# Altium PCB PCB main.PcbDoc (part 1 of 2)
Units mm, origin at the board's own origin, x right, y up, seen from the top; angles counter-clockwise.
Board outline 83.62 x 83.62 mm, 2 copper layers (Top Layer, Bottom Layer); 47 components, 37 nets, 165 pads, 21 vias.
Unrouted connection lines stored in the file: 3.
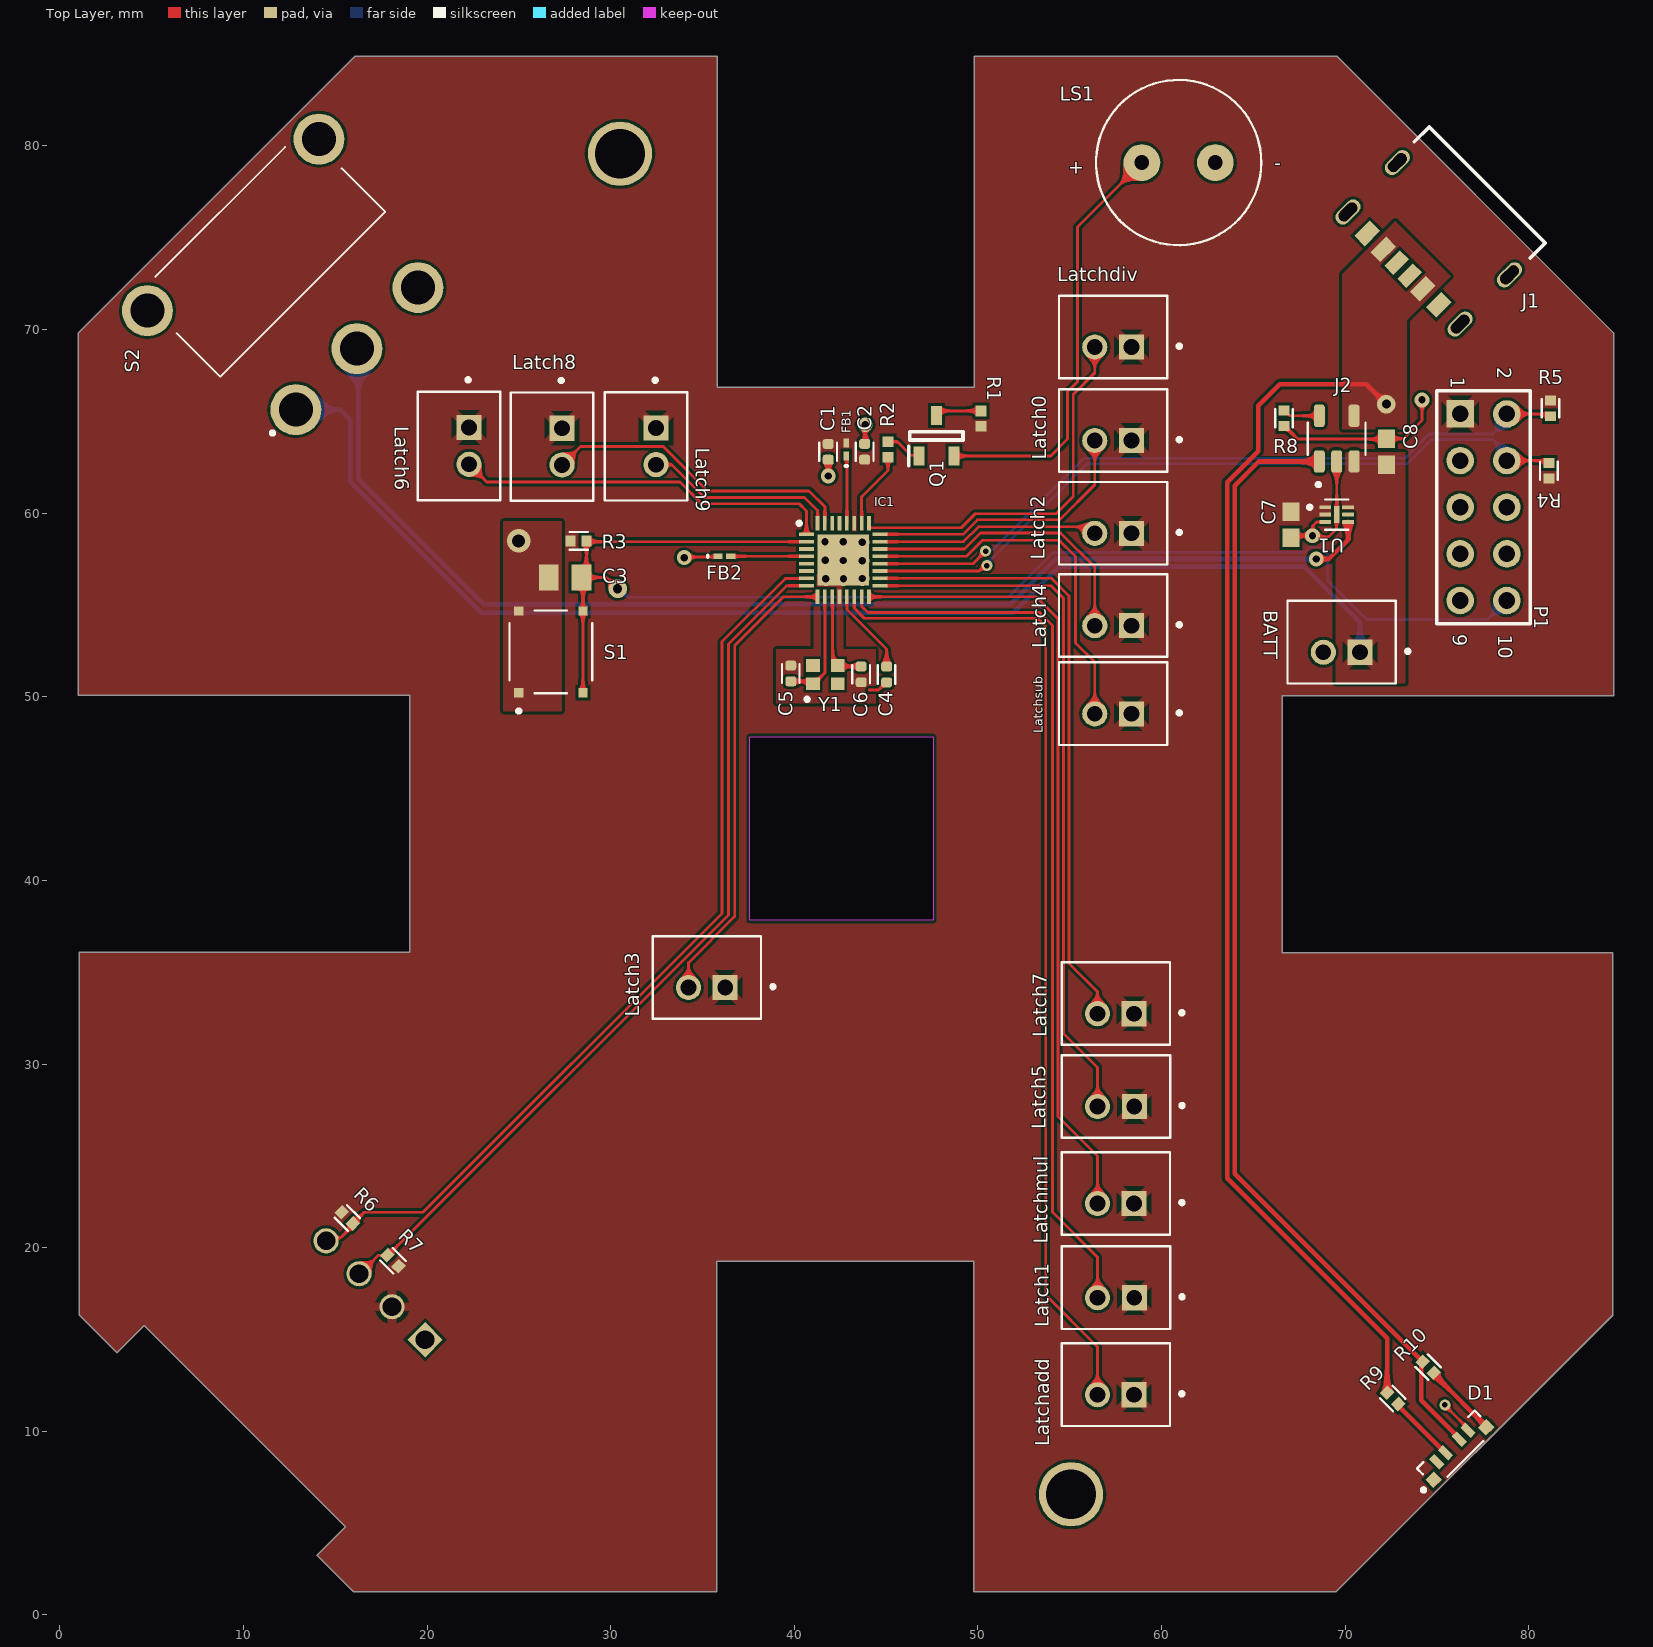
[diagram p0: Top Layer view]
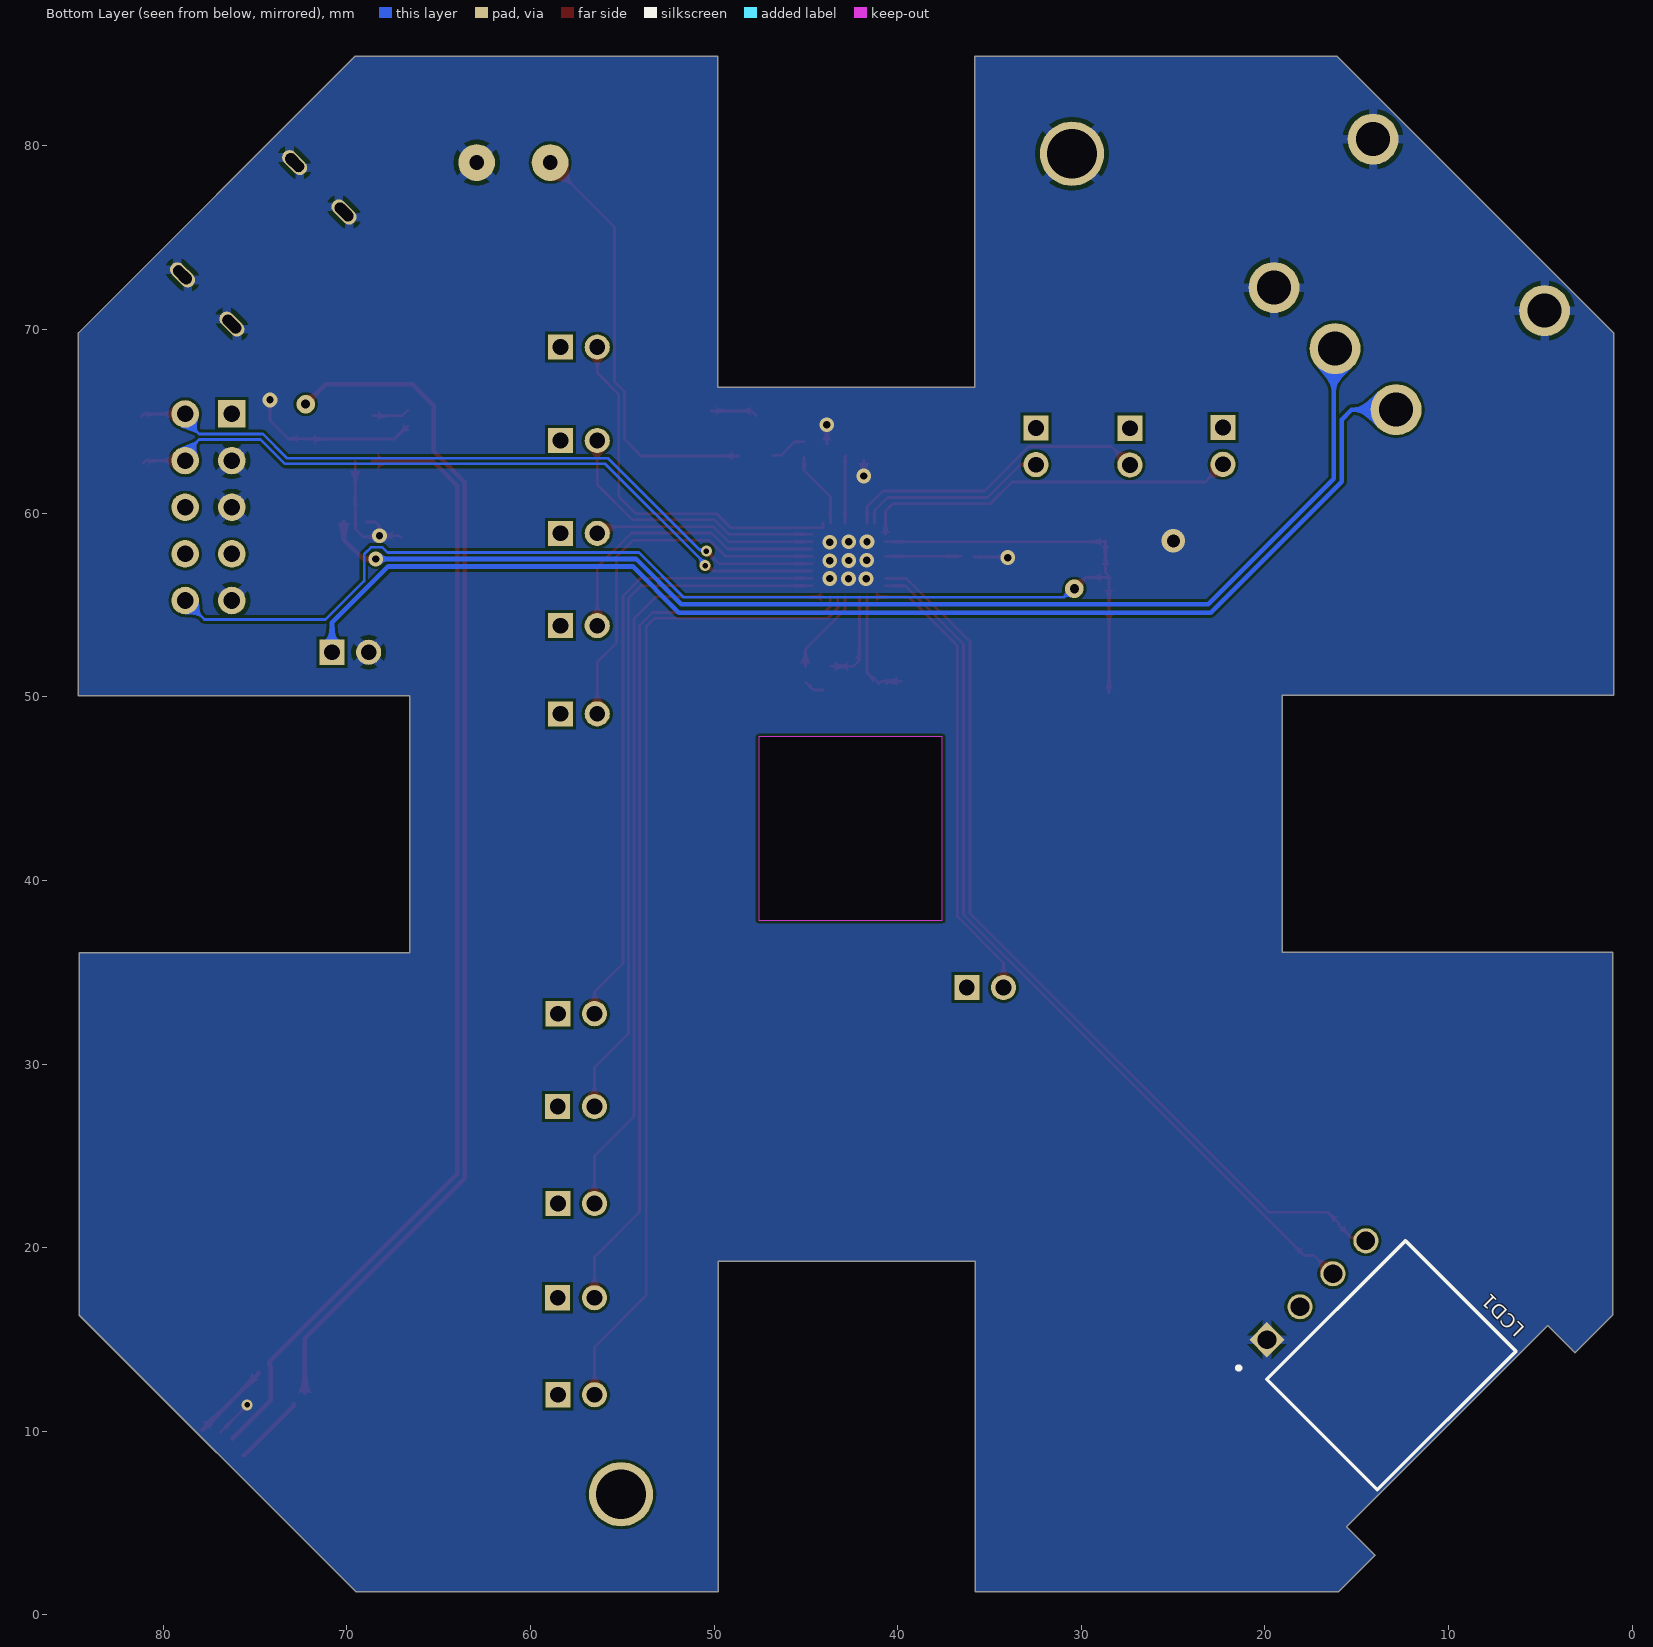
[diagram p1: Bottom Layer view, seen from below]
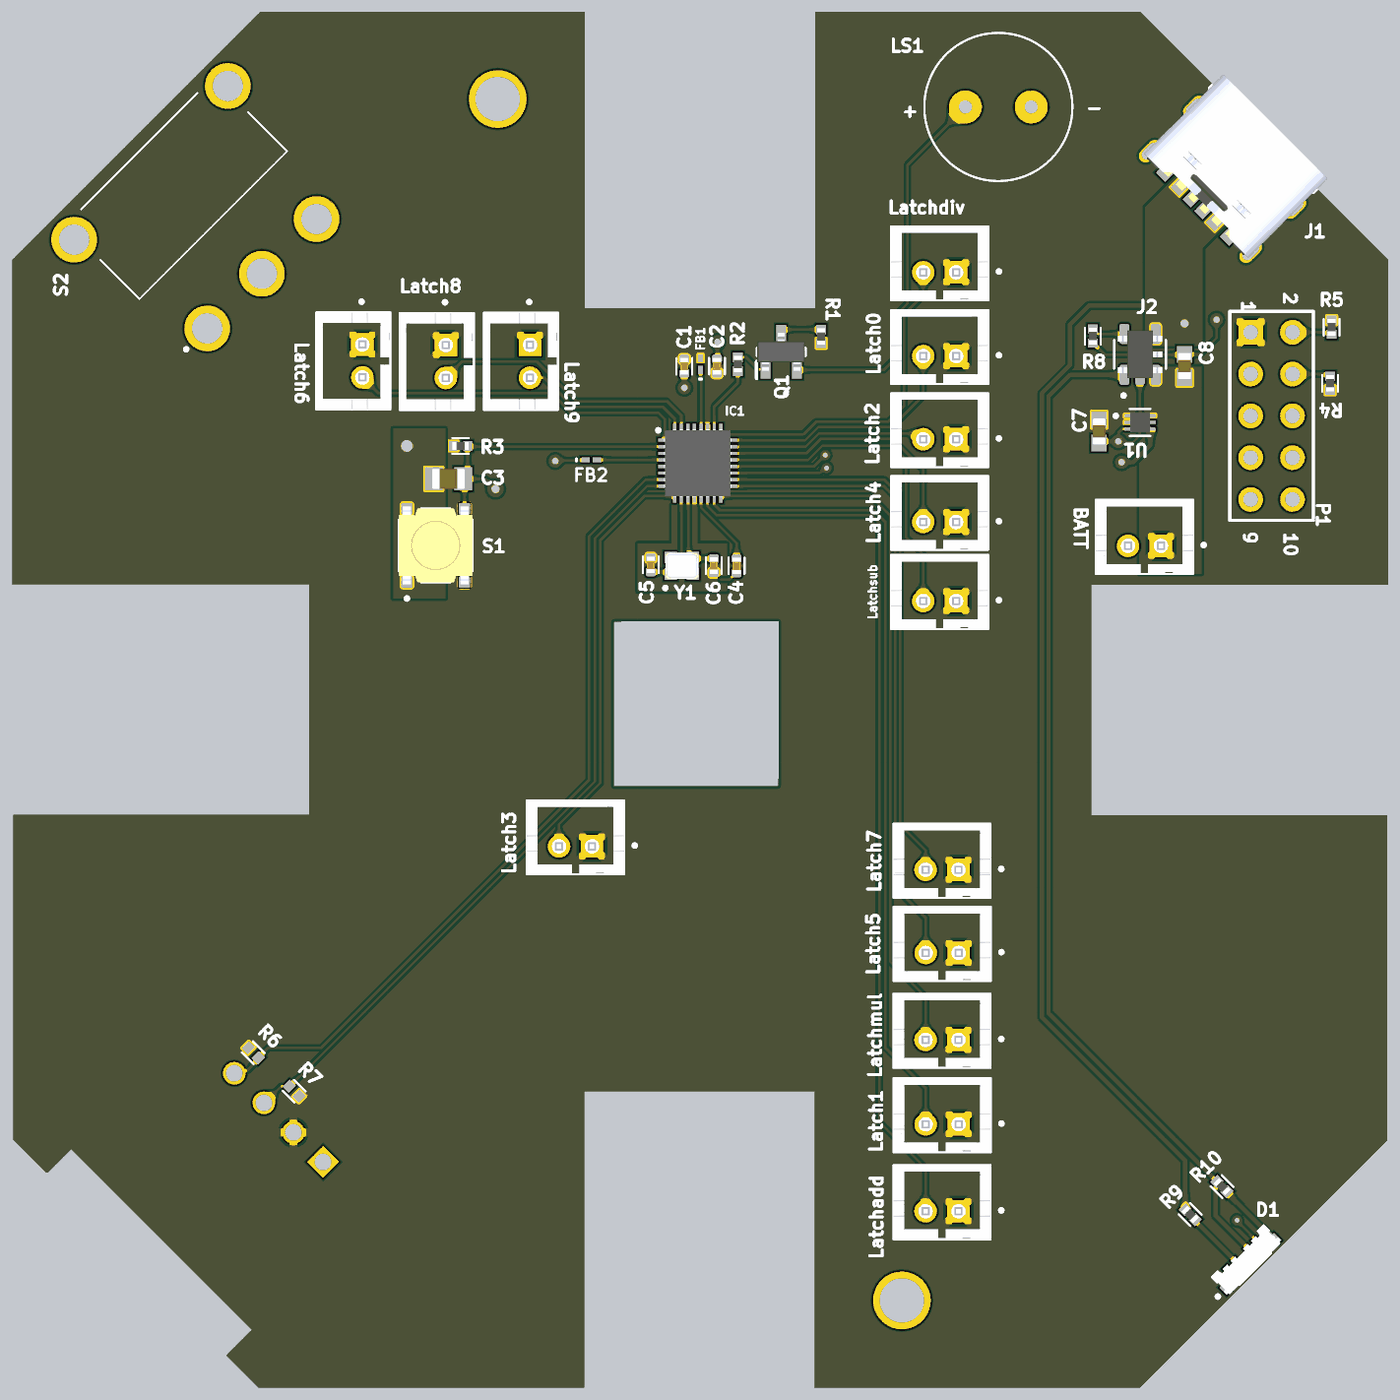
[diagram p2: 3D render of the assembled board from above, using the file's embedded part models]

## Layer stack, top to bottom
Top Solder: solder mask 0.0102, Solder Resist, Dk 3.5
Top Layer: signal copper 0.0356
Dielectric 1: dielectric 0.32, FR-4, Dk 4.8
Bottom Layer: signal copper 0.0356
Bottom Solder: solder mask 0.0102, Solder Resist, Dk 3.5

## Board outline
14.005,3.241 15.559,4.795 4.597,15.757 3.115,14.275 1.065,16.325 1.065,36.075 19.065,36.075 19.065,50.075 1.011,50.075 1.011,69.825 16.066,84.88 35.816,84.88 35.816,66.86 49.816,66.86 49.816,84.88 69.566,84.88 69.573,84.873 84.627,69.818 84.627,50.068 66.573,50.068 66.573,36.068 84.573,36.068 84.573,16.318 69.519,1.264 49.769,1.264 49.769,19.264 35.769,19.264 35.769,1.264 15.983,1.264
cut-out: 37.565,47.818 47.565,47.818 47.565,37.818 37.565,37.818

## Design rules (kind name [scope] priority, off if disabled: settings)
Clearance [All] p1: gap=0.15 ignorepadtopadclearanceinfootprint=TRUE
ComponentClearance [All] p1: gap=0 collisioncheckmode=3 verticalgap=0 showdistances=FALSE donotcheckwithout3dbody=TRUE
PlaneConnect [All] p1: pad.planeconnectstyle=Relief pad.reliefexpansion=0.508 pad.reliefentries=4 pad.reliefconductorwidth=0.254 pad.reliefairgap=0.254 via.planeconnectstyle=Direct via.reliefexpansion=0.508 via.reliefentries=4 via.reliefconductorwidth=0.254 via.reliefairgap=0.254
PolygonConnect [All] p1: thpad.connectstyle=Relief thpad.reliefconductorwidth=0.5 thpad.reliefentries=4 thpad.polygonreliefangle="45 Angle" thpad.airgapwidth=0.25 smdpad.connectstyle=Direct smdpad.reliefconductorwidth=0.254 smdpad.reliefentries=4 smdpad.polygonreliefangle="90 Angle" smdpad.airgapwidth=0.254 via.connectstyle=Direct via.reliefconductorwidth=0 via.reliefentries=4 via.polygonreliefangle="90 Angle" via.airgapwidth=0.254
RoutingVias [All] p1: holewidth=0.4 width=0.8 viastyle="Through Hole" minholewidth=0.3 minwidth=0.6 maxholewidth=0.711 maxwidth=1.27
SolderMaskExpansion [All] p1: expansion=0.102 istentingtop=FALSE
Width [All] p1: maxlimit=0.5 minlimit=0.15 preferedwidth=0.254 checkconnectedcopper=TRUE
28 further rules are at their usual default settings.

## Classes and differential pairs
component class Power: BATT C7 C8 D1 J1 J2 R8 R9 S2 U1
component class MCU: C1 C2 C3 C4 C5 C6 FB1 FB2 IC1 Latch0 Latch1 Latch2 Latch3 Latch4 Latch5 Latch6 Latch7 Latch8 Latch9 Latchadd Latchdiv Latchmul Latchsub LCD1 LS1 P1 Q1 R1 R2 R3 R4 R5 R6 R7 S1 Y1

## Components (designator, comment, footprint, x,y, rotation, side; value= is the part's Value field where it differs from the comment)
BATT "" JST_B2B-PH-K-S(LF)(SN) 69.815,52.976 r0 top
C1 "100nF" CAPC1005X55N 41.851,63.343 r90 top
C2 "100nF" CAPC1005X55N 43.836,63.344 r270 top
C3 "10uF" CAPC2012X140N 27.521,56.496 r0 top
C4 "1uF" CAPC1005X55N 45.03,51.214 r90 top
C5 "20pF" CAPC1005X55N 39.811,51.27 r90 top
C6 "20pF" CAPC1005X55N 43.646,51.221 r270 top
C7 "" CAPC1608X90N 67.056,59.381 r90 top
C8 "" CAPC1608X90N 72.251,63.35 r270 top
D1 "" LED_QLS6B-FKW-CNSNSF043 76.124,8.915 r45 top
FB1 "850mR" 0603 42.839,63.465 r90 top
FB2 "850mR" 0603 36.195,57.648 r0 top
IC1 "NUC029TAN" QFN40P400X400X80-33N 42.669,57.448 r0 top
J1 "" GCT_USB4125-GF-A_REVA2 75.335,75.472 r135 top
J2 "" SOT95P280X145-5N 69.545,64.059 r90 top
Latch0 "" JST_B2B-PH-K-S(LF)(SN) 57.369,64.507 r0 top
Latch1 "B2B-PH-K-S(LF)(SN)" JST_B2B-PH-K-S(LF)(SN) 57.522,17.822 r0 top
Latch2 "B2B-PH-K-S(LF)(SN)" JST_B2B-PH-K-S(LF)(SN) 57.369,59.453 r0 top
Latch3 "B2B-PH-K-S(LF)(SN)" JST_B2B-PH-K-S(LF)(SN) 35.239,34.713 r0 top
Latch4 "B2B-PH-K-S(LF)(SN)" JST_B2B-PH-K-S(LF)(SN) 57.369,54.423 r0 top
Latch5 "B2B-PH-K-S(LF)(SN)" JST_B2B-PH-K-S(LF)(SN) 57.522,28.236 r0 top
Latch6 "B2B-PH-K-S(LF)(SN)" JST_B2B-PH-K-S(LF)(SN) 21.737,63.662 r90 top
Latch7 "B2B-PH-K-S(LF)(SN)" JST_B2B-PH-K-S(LF)(SN) 57.512,33.291 r0 top
Latch8 "B2B-PH-K-S(LF)(SN)" JST_B2B-PH-K-S(LF)(SN) 26.809,63.627 r90 top
Latch9 "B2B-PH-K-S(LF)(SN)" JST_B2B-PH-K-S(LF)(SN) 31.923,63.643 r90 top
Latchadd "B2B-PH-K-S(LF)(SN)" JST_B2B-PH-K-S(LF)(SN) 57.512,12.539 r0 top
Latchdiv "B2B-PH-K-S(LF)(SN)" JST_B2B-PH-K-S(LF)(SN) 57.369,69.596 r0 top
Latchmul "B2B-PH-K-S(LF)(SN)" JST_B2B-PH-K-S(LF)(SN) 57.512,22.953 r0 top
Latchsub "B2B-PH-K-S(LF)(SN)" JST_B2B-PH-K-S(LF)(SN) 57.369,49.623 r0 top
LCD1 "SSQ-104-02-T-S-RA" SAMTEC_SSQ-104-02-T-S-RA 13.116,13.594 r315 bottom
LS1 "CMT-0904-83T" XDCR_CMT-0904-83T 60.935,79.096 r0 top
P1 "67997-410HLF" HDR2X5 76.268,65.404 r270 top
Q1 "PMBT3904,215" SOT95P230X110-3N 47.739,64.215 r90 top
R1 "100R" RESC1005X35N 50.165,65.151 r270 top
R2 "1kR" RESC1005X35N 45.104,63.468 r90 top
R3 "10kR" RESC1005X40 28.256,58.494 r180 top
R4 "10kR" RESC1005X40 81.094,62.308 r270 top
R5 "10kR" RESC1005X40 81.188,65.708 r90 top
R6 "4.7kR" RESC1005X40 15.661,21.62 r135 top
R7 "4.7kR" RESC1005X40 18.144,19.284 r315 top
R8 "" RESC1005X40 66.676,65.169 r270 top
R9 "180R" RESC1005X40 72.593,11.786 r315 top
R10 "180R" RESC1005X40 74.524,13.487 r315 top
S1 "TL3315NF100Q" SW_TL3315NF100Q 26.744,52.451 r90 top
S2 "" 1101M2S3ABE2 12.856,65.638 r225 top
U1 "" SON40P120X120X60-7N 69.545,59.924 r0 top
Y1 "24MHz" OSC_XRCGB24M000F0L00R0 41.7,51.214 r90 top

## Footprints (in the part's own frame and the unit in brackets; to place one, negate y for a bottom-side part, rotate by r counter-clockwise, add the part's x,y. Pads: shape width x height; smd on the part's side, far side on the other; paste and mask are expansions set on the pad)
0603 [mm] "Chip Inductor, Body 0.6x0.3mm, IPC High Density"
  rect 0.5x0.3 smd: 1(-0.35,0) 2(0.35,0)
  silkscreen extent -0.9,-0.05 -0.9,0.05, body extent -0.33,-0.18 0.33,0.18, height 0.55
1101M2S3ABE2 [mm]
  round 2.775 hole 1.85: 1(0,0) 2(-4.7,0) 3(-9.4,0) 4(-11.305,-9.53) 5(1.905,-9.53)
  silkscreen extent -11.05,-10.53 1.9,0.1
CAPC1005X55N [mm]
  rrect53% 0.54x0.6 smd: 1(-0.43,0) 2(0.43,0)
  silkscreen extent -0.5,-0.48 0.5,0.48, body extent -0.5,-0.25 0.5,0.25, height 0.55
CAPC1608X90N [mm]
  rect 1.01x0.93 smd: 1(-0.709,0) 2(0.709,0)
  body extent -0.8,-0.4 0.8,0.4, height 0.9
CAPC2012X140N [mm]
  rect 1.08x1.42 smd: 1(-0.895,0) 2(0.895,0)
  body extent -1,-0.63 1,0.63, height 1.4
GCT_USB4125-GF-A_REVA2 [mm]
  rect 0.7x1.2 smd: A5(-0.5,3.08) B5(0.5,3.08)
  rect 0.76x1.2 smd: A9(1.52,3.08) B9(-1.52,3.08)
  rect 0.8x1.2 smd: A12(2.75,3.08) B12(-2.75,3.08)
  oval 0.8x1.6 hole 0.6 slot 1.2 at 90 deg mask+0: S1(-4.32,3) S2(4.32,3) S3(-4.32,-0.8) S4(4.32,-0.8)
  silkscreen extent -4.47,-3.4 4.47,-2.25, body extent -4.47,-3.45 4.47,3.45, height 3.26
HDR2X5 [mm] "Connector; Header; 5x2 Position"
  rect 1.5x1.5 hole 0.9: 1(0,0)
  round 1.5 hole 0.9: 2(0,2.54) 3(2.54,0) 4(2.54,2.54) 5(5.08,0) 6(5.08,2.54) 7(7.62,0) 8(7.62,2.54) 9(10.16,0) 10(10.16,2.54)
  silkscreen extent -1.27,-1.27 11.43,3.81
JST_B2B-PH-K-S(LF)(SN) [mm]
  rect 1.368x1.368 hole 0.86: 1(1,-0.55)
  round 1.368 hole 0.86: 2(-1,-0.55)
  silkscreen extent -2.95,-2.25 3.7,2.25, body extent -2.95,-2.25 2.95,2.25, height 3
LED_QLS6B-FKW-CNSNSF043 [mm]
  rect 0.66x0.63 smd: 1(-2.02,-0.185) 6(2.02,-0.185)
  rect 0.4x0.8 smd: 2(-1.21,0.4) 3(-0.53,0.4) 4(0.53,0.4) 5(1.21,0.4)
  silkscreen extent -2.9,-0.6 2.23,0.9, body extent -2.35,-0.6 2.35,0.9, height 1.3
OSC_XRCGB24M000F0L00R0 [mm]
  rect 0.7x0.75 smd: 1(-0.5,0.675) 2(-0.5,-0.675) 3(0.5,-0.675) 4(0.5,0.675)
  silkscreen extent -1.45,0.9 -1.25,1.1, body extent -0.8,-1 0.8,1, height 0.7
QFN40P400X400X80-33N [mm]
  rect 0.8x0.2 smd: 1(-2,1.4) 2(-2,1) 3(-2,0.6) 4(-2,0.2) 5(-2,-0.2) 6(-2,-0.6) 7(-2,-1) 8(-2,-1.4) 17(2,-1.4) 18(2,-1) 19(2,-0.6) 20(2,-0.2) 21(2,0.2) 22(2,0.6) 23(2,1) 24(2,1.4)
  rect 0.2x0.8 smd: 9(-1.4,-2) 10(-1,-2) 11(-0.6,-2) 12(-0.2,-2) 13(0.2,-2) 14(0.6,-2) 15(1,-2) 16(1.4,-2) 25(1.4,2) 26(1,2) 27(0.6,2) 28(0.2,2) 29(-0.2,2) 30(-0.6,2) 31(-1,2) 32(-1.4,2)
  rect 2.8x2.8 smd: 33(0,0)
  silkscreen extent -2.5,1.9 -2.3,2.1, body extent -2.05,-2.05 2.05,2.05, height 0.8
RESC1005X35N [mm]
  rect 0.59x0.6 smd: 1(-0.42,0) 2(0.42,0)
  body extent -0.5,-0.25 0.5,0.25, height 0.35
RESC1005X40 [mm]
  rect 0.54x0.6 smd: 1(-0.43,0) 2(0.43,0)
  silkscreen extent -0.5,-0.48 0.5,0.48, body extent -0.5,-0.25 0.5,0.25, height 0.35
SAMTEC_SSQ-104-02-T-S-RA [mm]
  rect 1.37x1.37 hole 1.02: 01(3.81,-5.775)
  round 1.37 hole 1.02: 02(1.27,-5.775) 03(-1.27,-5.775) 04(-3.81,-5.775)
  silkscreen extent -5.34,-5.87 6.08,4.25
SON40P120X120X60-7N [mm]
  rrect25% 0.65x0.2 smd: 1(-0.625,0.4) 2(-0.625,0) 3(-0.625,-0.4) 4(0.625,-0.4) 5(0.625,0) 6(0.625,0.4)
  rect 0.3x0.94 smd paste-1: 7(0,0)
  silkscreen extent -1.57,-0.82 0.62,0.82, body extent -0.6,-0.6 0.6,0.6, height 0.6
SOT95P230X110-3N [mm]
  rect 1.05x0.6 smd: 1(-1.1,0.95) 2(-1.1,-0.95) 3(1.1,0)
  silkscreen extent -1.63,-1.45 0.23,1.5, body extent -1.15,-1.45 1.15,1.45, height 1.1
SOT95P280X145-5N [mm]
  rrect50% 1.22x0.6 smd: 1(-1.245,0.95) 2(-1.245,0) 3(-1.245,-0.95) 4(1.245,-0.95) 5(1.245,0.95)
  silkscreen extent -2.6,-1.57 0.88,1.57, body extent -1.45,-1.35 1.45,1.35, height 1.45
SW_TL3315NF100Q [mm]
  rect 0.5x0.5 smd paste+0.1 mask+0.2: 1(-2.23,1.75) 2(2.23,1.75) 3(-2.23,-1.75) 4(2.23,-1.75)
  silkscreen extent -3.33,-2.25 2.25,2.25, body extent -2.37,-2.25 2.37,2.25, height 0.6
XDCR_CMT-0904-83T [mm]
  round 2 hole 0.8: N(2,0) P(-2,0)
  silkscreen extent -4.5,-4.5 4.5,4.5

## Part data
BATT Latch0: library part B2B-PH-K-S(LF)(SN), "Connector Header, PH Series, 2 Position, 2.00mm, Through Hole, Press-Fit, Solder, Natural", Color=Natural, Contact Resistance=20mR, Current Rating=2A, Flammability Rating="UL94 V-0", Housing Color=White, Insulation Resistance=1MR, Manufacturer=JST, Manufacturer Part Number=B2BPHKSLFSN, Max Operating Temperature=85°C, Max Voltage Rating (AC)=100V, Min Operating Temperature=-25°C, Category=Connectors, ComponentLink1Description=https://datasheet.ciiva.com/6747/80560-6747392.pdf?src-supplier=Newark, ComponentLink1URL=https://datasheet.ciiva.com/6747/80560-6747392.pdf?src-supplier=Newark, ComponentLink2Description=https://datasheet.ciiva.com/11746/0900766b8082f551-11746676.pdf?src-supplier=RSComponents, ComponentLink2URL=https://datasheet.ciiva.com/11746/0900766b8082f551-11746676.pdf?src-supplier=RSComponents, ComponentLink3Description=https://datasheet.ciiva.com/712/eph-712442.pdf?src-supplier=Digi-Key, ComponentLink3URL=https://datasheet.ciiva.com/712/eph-712442.pdf?src-supplier=Digi-Key, ComponentLink4Description=https://datasheet.ciiva.com/8052/80560-8052022.pdf?src-supplier=Element14, ComponentLink4URL=https://datasheet.ciiva.com/8052/80560-8052022.pdf?src-supplier=Element14, ComponentLink5Description=https://datasheet.ciiva.com/16422/b2b-ph-k-slfsn-16422715.pdf?src-supplier=Future+Electronics, ComponentLink5URL=https://datasheet.ciiva.com/16422/b2b-ph-k-slfsn-16422715.pdf?src-supplier=Future+Electronics, Connector Type=Header, Contact Finish - Mating=TIN, Contact Material=Brass, Contact Mating Length=0.13inch, Contact Plating=Tin,Copper, Contact Post Length=0.134inch, Contact Shape=Square, Contact Type="Male Pin", Depth=4.5mm, Fastening Type=Detent, Gender=Male, Height=9.4mm, Housing Material=Polyamide, Insulation Color=Natural, Insulation Height=0.236inch, Insulation Material=Nylon, Lead Free="Lead Free", Lead Pitch=2mm, Length=5.9mm, Mated Stacking Heights=8mm, Max Current Rating=2A, Max Voltage Rating (DC)=100V, Mount="Through Hole", Number of Contacts=2, Number of Pins=2, Number of Poles=2, Number of Positions=2, Number of Rows=1, Orientation=Straight, Packaging=Bulk, Pitch=2mm, REACH SVHC="No SVHC", RoHS=Yes, Series=PH, Supplier 1="Arrow Electronics", Termination=Press-Fit, Voltage Rating=100V, Voltage Rating (AC)=100V, Width=4.5mm, Working Voltage=100V
C1 C2: library part CL05A104KA5NNNC, "Prices include import duty and tax. CAP, 0.1UF, 25V, MLCC, 0402; SVHC: No SVHC (15-Jan-2019)", Case Code (Imperial)=0402, Case Code (Metric)=1005, Dielectric=X5R, Manufacturer=Samsung, Max Operating Temperature=85°C, Min Operating Temperature=-55°C, Package Quantity=1, Tolerance=10%, Voltage=25V, Capacitance=100nF, Case/Package=0402, Category="Ceramic Capacitors", ComponentLink1Description=https://datasheet.ciiva.com/25802/cl05a104ka5nnnc-25802704.pdf?src-supplier=Digi-Key, ComponentLink1URL=https://datasheet.ciiva.com/25802/cl05a104ka5nnnc-25802704.pdf?src-supplier=Digi-Key, ComponentLink2Description=https://datasheet.ciiva.com/16437/cl05a104ka5nnnc-16437369.pdf?src-supplier=Future+Electronics, ComponentLink2URL=https://datasheet.ciiva.com/16437/cl05a104ka5nnnc-16437369.pdf?src-supplier=Future+Electronics, ComponentLink3Description=https://datasheet.ciiva.com/26838/getdatasheetpartid-357412-26838142.pdf?src-supplier=Verical, ComponentLink3URL=https://datasheet.ciiva.com/26838/getdatasheetpartid-357412-26838142.pdf?src-supplier=Verical, ComponentLink4Description=https://datasheet.ciiva.com/26309/mlcc-catalogdownload2013-eng-26309014.pdf?src-supplier=Distrelec, ComponentLink4URL=https://datasheet.ciiva.com/26309/mlcc-catalogdownload2013-eng-26309014.pdf?src-supplier=Distrelec, Depth=0.5mm, Height=0.5mm, Lead Free="Lead Free", Length=1mm, Manufacturer Part Number=CL05A104KA5NNNC, Mount="Surface Mount", Packaging="Tape and Reel", Pricing 1="1=0.10000, 10=0.01200, 50=0.00640, 100=0.00520, 500=0.00370, 1000=0.00291, 2500=0.00264, 5000=0.00243 (USD)", Radiation Hardening=No, RoHS=Yes, Stock 1=3456201, Supplier 1=Digi-Key, Thickness=0.022inch, Voltage Rating=25V, Voltage Rating (DC)=25V, Width=0.02inch
C3: library part GRM21BR61E106MA73L, "MURATA - GRM21BR61E106MA73L - SMD Multilayer Ceramic Capacitor, 10 µF, 25 V, 0805 [2012 Metric], ± 20%, X5R, GRM Series", Case Code (Imperial)=0805, Case Code (Metric)=2012, Dielectric=X5R, Manufacturer=Murata, Max Operating Temperature=85°C, Min Operating Temperature=-55°C, Package Quantity=3000, Resistor Type=Ceramic, Tolerance=20%, Voltage Rating=25V, Capacitance=10uF, Case/Package=0805, Category="Ceramic Capacitors", ComponentLink1Description=http://www.farnell.com/datasheets/2079185.pdf?src-supplier=Farnell, ComponentLink1URL=http://www.farnell.com/datasheets/2079185.pdf?src-supplier=Farnell, ComponentLink2Description=http://www.mouser.com/ds/2/281/c02e-2905.pdf?src-supplier=Mouser, ComponentLink2URL=http://www.mouser.com/ds/2/281/c02e-2905.pdf?src-supplier=Mouser, ComponentLink3Description=http://components.arrow.com/part/dataview/0323_03061623?src-supplier=Arrow+Europe, ComponentLink3URL=http://components.arrow.com/part/dataview/0323_03061623?src-supplier=Arrow+Europe, ComponentLink4Description=https://search.murata.co.jp/Ceramy/image/img/A01X/G101/ENG/GRM21BR61E106MA73-01.pdf?src-supplier=Digi-Key, ComponentLink4URL=https://search.murata.co.jp/Ceramy/image/img/A01X/G101/ENG/GRM21BR61E106MA73-01.pdf?src-supplier=Digi-Key, ComponentLink5Description=http://www.farnell.com/datasheets/2079185.pdf?src-supplier=Element14, ComponentLink5URL=http://www.farnell.com/datasheets/2079185.pdf?src-supplier=Element14, Depth=1.25mm, Height=1.25mm, Lead Free="Lead Free", Length=2mm, Manufacturer Part Number=GRM21BR61E106MA73L, Mount="Surface Mount", Packaging="Tape and Reel", Pricing 1="1=0.26000, 10=0.17900, 50=0.11960, 100=0.10170, 500=0.07176, 1000=0.06279 (USD)", REACH SVHC="No SVHC", RoHS=Yes, RoHS Compliant=Yes, Stock 1=389936, Supplier 1=Digi-Key, Termination=SMD/SMT, Thickness=0.055inch, Voltage Rating (DC)=25V, Weight=0.000335oz, Width=0.049inch
C4: library part LMK105BJ105KV-F, "Cap Ceramic 1uF 10V X5R 10% Pad SMD 0402 85°C T/R", Case Code (Imperial)=0402, Case Code (Metric)=1005, Dielectric=X5R, Manufacturer="Taiyo Yuden", Max Operating Temperature=85°C, Min Operating Temperature=-55°C, Package Quantity=1, Resistor Type=Ceramic, Supplier Part Number 1=587-1454-1-ND, Tolerance=10%, Voltage Rating=10V, Capacitance=1uF, Case/Package=0402, Category="Ceramic Capacitors", ComponentLink1Description=https://datasheet.ciiva.com/131/lmk105bj105kv-f-ss-131735.pdf?src-supplier=Digi-Key, ComponentLink1URL=https://datasheet.ciiva.com/131/lmk105bj105kv-f-ss-131735.pdf?src-supplier=Digi-Key, ComponentLink2Description=https://datasheet.ciiva.com/15921/463lmk105bj105kv-f-15921218.pdf?src-supplier=Onlinecomponents.com, ComponentLink2URL=https://datasheet.ciiva.com/15921/463lmk105bj105kv-f-15921218.pdf?src-supplier=Onlinecomponents.com, ComponentLink3Description=https://datasheet.ciiva.com/26872/getdatasheetpartid-637441-26872608.pdf?src-supplier=Verical, ComponentLink3URL=https://datasheet.ciiva.com/26872/getdatasheetpartid-637441-26872608.pdf?src-supplier=Verical, ComponentLink4Description=https://datasheet.ciiva.com/30256/308lmk105bj105kv-f-30256903.pdf?src-supplier=Onlinecomponents.com, ComponentLink4URL=https://datasheet.ciiva.com/30256/308lmk105bj105kv-f-30256903.pdf?src-supplier=Onlinecomponents.com, Construction=Flat, Depth=0.5mm, Halogen Free="Halogen Free", Height=0.5mm, Lead Free="Lead Free", Length=1mm, Manufacturer Part Number=LMK105BJ105KV-F, Mount="Surface Mount", Packaging="Tape and Reel", Pricing 1="1=0.11000, 10=0.08200, 50=0.04480, 100=0.03660, 500=0.02616, 1000=0.02056, 2500=0.01869, 5000=0.01719 (USD)", Radiation Hardening=No, REACH SVHC=Unknown, RoHS=Yes, RoHS Compliant=Yes, Series=M, Stock 1=1517627, Supplier 1=Digi-Key, Termination=SMD/SMT, Thickness=0.022inch, Voltage Rating (DC)=10V, Width=0.5mm
C5 C6: library part GRM1555C1H200JA01D, "CAP CER 20PF 50V C0G/NP0 0402", Case Code (Imperial)=0402, Case Code (Metric)=1005, Dielectric=C0G, Manufacturer=Murata, Max Operating Temperature=125°C, Min Operating Temperature=-55°C, Package Quantity=10000, Tolerance=5%, Voltage=50V, Capacitance=20pF, Case/Package=0402, Category="Ceramic Capacitors", ComponentLink1Description=https://datasheet.ciiva.com/18184/getdatasheetpartid-318562-18184258.pdf?src-supplier=Verical, ComponentLink1URL=https://datasheet.ciiva.com/18184/getdatasheetpartid-318562-18184258.pdf?src-supplier=Verical, ComponentLink2Description=https://datasheet.ciiva.com/6263/grm1555c1h200ja01-01-6263897.pdf?src-supplier=Digi-Key, ComponentLink2URL=https://datasheet.ciiva.com/6263/grm1555c1h200ja01-01-6263897.pdf?src-supplier=Digi-Key, ComponentLink3Description=https://datasheet.ciiva.com/16507/l0005e-16507883.pdf?src-supplier=Future+Electronics, ComponentLink3URL=https://datasheet.ciiva.com/16507/l0005e-16507883.pdf?src-supplier=Future+Electronics, ComponentLink4Description=https://datasheet.ciiva.com/6263/partnumbering-e-01-6263900.pdf?src-supplier=Digi-Key, ComponentLink4URL=https://datasheet.ciiva.com/6263/partnumbering-e-01-6263900.pdf?src-supplier=Digi-Key, ComponentLink5Description=https://datasheet.ciiva.com/7828/1666664-7828845.pdf?src-supplier=Element14, ComponentLink5URL=https://datasheet.ciiva.com/7828/1666664-7828845.pdf?src-supplier=Element14, ComponentLink6Description=https://datasheet.ciiva.com/6263/partnumbering-e-01-6263903.pdf?src-supplier=Digi-Key, ComponentLink6URL=https://datasheet.ciiva.com/6263/partnumbering-e-01-6263903.pdf?src-supplier=Digi-Key, Construction=Flat, Depth=0.5mm, Height=0.5mm, Lead Free="Lead Free", Length=1mm, Manufacturer Part Number=GRM1555C1H200JA01D, Material=Ceramic, Mount="Surface Mount", Packaging="Tape and Reel", Pricing 1="1=0.10000, 10=0.05800, 50=0.03180, 100=0.02590, 500=0.01852, 1000=0.01455, 2500=0.01322, 5000=0.01217 (USD)", Radiation Hardening=No, REACH SVHC="No SVHC", RoHS=Yes, RoHS Compliant=Yes, Series=GRM, Stock 1=1090856, Supplier 1=Digi-Key, Termination=SMD/SMT, Thickness=0.022inch, Voltage Rating=50V, Voltage Rating (DC)=50V, Width=0.5mm
C7 C8: library part CGA3E1X7R0J225K080AC, "Cap Ceramic 2.2uF 6.3V X7R 10% SMD 0603 125C Paper T/R", Capacitance=2.2uF, Case Code (Imperial)=0603, Case Code (Metric)=1608, Dielectric=X7R, Manufacturer=TDK, Max Operating Temperature=125°C, Min Operating Temperature=-55°C, Package Quantity=1, Ratings=AEC-Q200, Resistor Type=Ceramic, Tolerance=10%, Voltage Rating=6.3V, Case/Package=0603, Category="Ceramic Capacitors", ComponentLink1Description=https://datasheet.ciiva.com/24219/cga3e1x7r0j225k080ac-265889-24219571.pdf?src-supplier=Mouser, ComponentLink1URL=https://datasheet.ciiva.com/24219/cga3e1x7r0j225k080ac-265889-24219571.pdf?src-supplier=Mouser, ComponentLink2Description=https://datasheet.ciiva.com/28576/1796654-28576764.pdf?src-supplier=Element14, ComponentLink2URL=https://datasheet.ciiva.com/28576/1796654-28576764.pdf?src-supplier=Element14, ComponentLink3Description=https://datasheet.ciiva.com/22718/1796654-22718047.pdf?src-supplier=Element14, ComponentLink3URL=https://datasheet.ciiva.com/22718/1796654-22718047.pdf?src-supplier=Element14, Depth=0.8mm, Height=0.8mm, Lead Free="Lead Free", Length=1.6mm, Manufacturer Part Number=CGA3E1X7R0J225K080AC, Mount="Surface Mount", Packaging="Tape and Reel", Pricing 1="1=0.24000, 10=0.16500, 50=0.09900, 100=0.08360, 500=0.05720, 1000=0.05060 (USD)", REACH SVHC="No SVHC", RoHS=Yes, RoHS Compliant=Yes, Series=CGA, Stock 1=294875, Supplier 1=Digi-Key, Termination=SMD/SMT, Thickness=0.035inch, Voltage Rating (DC)=6.3V, Weight=7.1E-05oz, Width=0.031inch
D1: library part QLS6B-FKW-CNSNSF043, "CREE - QLS6B-FKW-CNSNSF043 - FULL RANK, TAPE&REEL 07AH1280", Case/Package=SMD/SMT, Color=Blue,Green,Red, Forward Voltage=3.1V, Manufacturer=Cree, Test Current=16mA, Category=LEDs, ComponentLink1Description=http://www.farnell.com/datasheets/2813763.pdf?src-supplier=Farnell, ComponentLink1URL=http://www.farnell.com/datasheets/2813763.pdf?src-supplier=Farnell, ComponentLink2Description=http://www.farnell.com/datasheets/2813763.pdf?src-supplier=Newark, ComponentLink2URL=http://www.farnell.com/datasheets/2813763.pdf?src-supplier=Newark, ComponentLink3Description=https://www.cree.com/led-components/media/documents/1397-QLS6BFKW.pdf?src-supplier=Digi-Key, ComponentLink3URL=https://www.cree.com/led-components/media/documents/1397-QLS6BFKW.pdf?src-supplier=Digi-Key, Dominant Wavelength=470nm, Height=1.3mm, Length=4.45mm, Lens Size=3.95mm, Lens Style=Flat, Luminous Intensity=1850mcd, Manufacturer Part Number=QLS6B-FKW-CNSNSF043, Mount="Surface Mount", Packaging="Tape and Reel", Pricing 1="1=0.36000, 25=0.33800, 50=0.32500, 100=0.31200 (USD)", RoHS=Yes, RoHS Compliant=Yes, Stock 1=3446, Supplier 1=Avnet, Width=1.3mm
FB1 FB2: library part Inductor, "FERRITE BEAD 1 KOHM 0603 1 LN", Case Code (Imperial)=0603, Case Code (Metric)=1608, Manufacturer=Murata, Manufacturer Part Number=BLM18BD102BH1D, Max Current Rating=200mA, Max Operating Temperature=150°C, Min Operating Temperature=-55°C, Ratings=AEC-Q200, Case/Package=0603, Category="Ferrite Beads and Chips", ComponentLink1Description=http://www.murata.com/en-us/products/productdata/8798137286686/QNFA9129.pdf?src-supplier=Digi-Key, ComponentLink1URL=http://www.murata.com/en-us/products/productdata/8798137286686/QNFA9129.pdf?src-supplier=Digi-Key, ComponentLink2Description=https://www.murata.com/en-us/products/productdata/8796733866014/S0594E.pdf?src-supplier=Digi-Key, ComponentLink2URL=https://www.murata.com/en-us/products/productdata/8796733866014/S0594E.pdf?src-supplier=Digi-Key, DC Resistance (DCR)=850mR, Number of Lines=1, Pricing 1="1=0.12000, 10=0.09900, 25=0.07680, 50=0.06380, 100=0.05500, 250=0.04400, 500=0.03960, 1000=0.03300 (USD)", RoHS=Yes, RoHS Compliant=Yes, Stock 1=790, Supplier 1=Digi-Key
IC1: "Integrated Circuit", Manufacturer=Nuvoton, Manufacturer Part Number=NUC029TAN, Pricing 1="1=1.92000, 10=1.72200, 25=1.62480, 80=1.38450, 230=1.30000, 490=1.13751, 980=0.94250, 2450=0.87750, 4900=0.84500 (USD)", RoHS=Yes, Stock 1=490, Supplier 1=Digi-Key
J1: library part USB4125-GF-A_REVA2, "USB Connector with 1.90mm shell stake length", Manufacturer="Global Connector Technology", Manufacturer Part Number=USB4125-GF-A-0190, Category=Uncategorized, Pricing 1="1=0.59500, 50=0.52900, 100=0.49500, 250=0.46200, 500=0.41200, 1000=0.38300, 1500=0.35400, 3000=0.29800 (USD)", RoHS=No, Stock 1=1979, Supplier 1=Newark
J2: library part MCP73831T-2ACI/OT, "MCP73831 Series Single-Cell Li-Ion/Li-Polymer Battery Charge Controller SOT-23-5", Case/Package=SOT-23, Drain to Source Resistance=350mR, Manufacturer=Microchip, Max Charge Current=500mA, Max Input Voltage=6V, Max Operating Temperature=85°C, Max Output Voltage=4.5V, Max Power Dissipation=1.54W, Min Operating Temperature=-40°C, Min Output Voltage=4.168V, Min Supply Voltage=3.75V, Output Voltage=4.2V, Voltage Rating=4.534V, Category="Battery Management", ComponentLink1Description=https://datasheet.ciiva.com/22828/0900766b80d2b53a-22828876.pdf?src-supplier=RSComponents, ComponentLink1URL=https://datasheet.ciiva.com/22828/0900766b80d2b53a-22828876.pdf?src-supplier=RSComponents, ComponentLink2Description=https://datasheet.ciiva.com/26344/651521-da-01-en-contr-mcp73831t-2aci-ot-sot-23-5-mcp-26344458.pdf?src-supplier=Conrad, ComponentLink2URL=https://datasheet.ciiva.com/26344/651521-da-01-en-contr-mcp73831t-2aci-ot-sot-23-5-mcp-26344458.pdf?src-supplier=Conrad, ComponentLink3Description=https://datasheet.ciiva.com/1931/21984e-1931953.pdf?src-supplier=Digi-Key, ComponentLink3URL=https://datasheet.ciiva.com/1931/21984e-1931953.pdf?src-supplier=Digi-Key, ComponentLink4Description=https://datasheet.ciiva.com/1931/21984e-1931954.pdf?src-supplier=Digi-Key, ComponentLink4URL=https://datasheet.ciiva.com/1931/21984e-1931954.pdf?src-supplier=Digi-Key, ComponentLink5Description=https://datasheet.ciiva.com/1931/21984e-1931955.pdf?src-supplier=Digi-Key, ComponentLink5URL=https://datasheet.ciiva.com/1931/21984e-1931955.pdf?src-supplier=Digi-Key, ComponentLink6Description=https://datasheet.ciiva.com/28626/630369-28626439.pdf?src-supplier=Element14, ComponentLink6URL=https://datasheet.ciiva.com/28626/630369-28626439.pdf?src-supplier=Element14, ComponentLink7Description=https://datasheet.ciiva.com/1137/630369-1137803.pdf?src-supplier=Element14, ComponentLink7URL=https://datasheet.ciiva.com/1137/630369-1137803.pdf?src-supplier=Element14, ComponentLink8Description=https://datasheet.ciiva.com/3213/21984e-3213404.pdf?src-supplier=Avnet, ComponentLink8URL=https://datasheet.ciiva.com/3213/21984e-3213404.pdf?src-supplier=Avnet, ComponentLink9Description=https://datasheet.ciiva.com/46385/630369-46385324.pdf?src-supplier=Element14, ComponentLink9URL=https://datasheet.ciiva.com/46385/630369-46385324.pdf?src-supplier=Element14, ComponentLink10Description=https://datasheet.ciiva.com/1144/630369-1144461.pdf?src-supplier=Newark, ComponentLink10URL=https://datasheet.ciiva.com/1144/630369-1144461.pdf?src-supplier=Newark, ComponentLink11Description=https://datasheet.ciiva.com/16286/filehandler-aspxddocname-en025112-16286957.pdf?src-supplier=Future+Electronics, ComponentLink11URL=https://datasheet.ciiva.com/16286/filehandler-aspxddocname-en025112-16286957.pdf?src-supplier=Future+Electronics, Contact Plating=Tin,Matte, Height=0.051inch, Lead Free="Lead Free", Length=0.122inch, Manufacturer Part Number=MCP73831T-2ACI/OT, Max Supply Voltage=6V, Mount="Surface Mount", Number of Cells=1, Number of Channels=1, Number of Outputs=1, Number of Pins=5, Output Current=500mA, Packaging="Tape and Reel", Pricing 1="1=0.69000, 25=0.63000 (USD)", Radiation Hardening=No, REACH SVHC="No SVHC", RoHS=Yes, RoHS Compliant=Yes, Series=MCP73831/2, Stock 1=1281, Supplier 1=Digi-Key, Termination=SMD/SMT, Weight=0.00709oz, Width=0.071inch
Latch1 Latch2 Latch3 Latch4 Latch5 Latch6 Latch7 Latch8 Latch9 Latchadd Latchdiv Latchmul Latchsub: "Connector Header, PH Series, 2 Position, 2.00mm, Through Hole, Press-Fit, Solder, Natural", Color=Natural, Contact Resistance=20mR, Current Rating=2A, Flammability Rating="UL94 V-0", Housing Color=White, Insulation Resistance=1MR, Manufacturer=JST, Manufacturer Part Number=B2BPHKSLFSN, Max Operating Temperature=85°C, Max Voltage Rating (AC)=100V, Min Operating Temperature=-25°C, Category=Connectors, ComponentLink1Description=https://datasheet.ciiva.com/6747/80560-6747392.pdf?src-supplier=Newark, ComponentLink1URL=https://datasheet.ciiva.com/6747/80560-6747392.pdf?src-supplier=Newark, ComponentLink2Description=https://datasheet.ciiva.com/11746/0900766b8082f551-11746676.pdf?src-supplier=RSComponents, ComponentLink2URL=https://datasheet.ciiva.com/11746/0900766b8082f551-11746676.pdf?src-supplier=RSComponents, ComponentLink3Description=https://datasheet.ciiva.com/712/eph-712442.pdf?src-supplier=Digi-Key, ComponentLink3URL=https://datasheet.ciiva.com/712/eph-712442.pdf?src-supplier=Digi-Key, ComponentLink4Description=https://datasheet.ciiva.com/8052/80560-8052022.pdf?src-supplier=Element14, ComponentLink4URL=https://datasheet.ciiva.com/8052/80560-8052022.pdf?src-supplier=Element14, ComponentLink5Description=https://datasheet.ciiva.com/16422/b2b-ph-k-slfsn-16422715.pdf?src-supplier=Future+Electronics, ComponentLink5URL=https://datasheet.ciiva.com/16422/b2b-ph-k-slfsn-16422715.pdf?src-supplier=Future+Electronics, Connector Type=Header, Contact Finish - Mating=TIN, Contact Material=Brass, Contact Mating Length=0.13inch, Contact Plating=Tin,Copper, Contact Post Length=0.134inch, Contact Shape=Square, Contact Type="Male Pin", Depth=4.5mm, Fastening Type=Detent, Gender=Male, Height=9.4mm, Housing Material=Polyamide, Insulation Color=Natural, Insulation Height=0.236inch, Insulation Material=Nylon, Lead Free="Lead Free", Lead Pitch=2mm, Length=5.9mm, Mated Stacking Heights=8mm, Max Current Rating=2A, Max Voltage Rating (DC)=100V, Mount="Through Hole", Number of Contacts=2, Number of Pins=2, Number of Poles=2, Number of Positions=2, Number of Rows=1, Orientation=Straight, Packaging=Bulk, Pitch=2mm, REACH SVHC="No SVHC", RoHS=Yes, Series=PH, Supplier 1="Arrow Electronics", Termination=Press-Fit, Voltage Rating=100V, Voltage Rating (AC)=100V, Width=4.5mm, Working Voltage=100V
LCD1: "Conn Socket Strip SKT 4 POS 2.54mm Solder RA Thru-Hole Bulk", Color=Black, Manufacturer=Samtec, Category=Connectors, ComponentLink1Description=https://datasheet.ciiva.com/749/ssq-1xx-xx-xxx-x-xx-xxx-xx-x-mkt-749183.pdf?src-supplier=Digi-Key, ComponentLink1URL=https://datasheet.ciiva.com/749/ssq-1xx-xx-xxx-x-xx-xxx-xx-x-mkt-749183.pdf?src-supplier=Digi-Key, Connector Type=Receptacle,Socket, Contact Material=Bronze, Contact Plating=Tin, Gender=Female, Height=2.41mm, Housing Color=Black, Housing Material=Plastic, Lead Free="Lead Free", Length=10.7mm, Manufacturer Part Number=SSQ-104-02-T-S-RA, Mount="Through Hole", Number of Contacts=4, Number of Positions=4, Number of Rows=1, Packaging=Bulk, Pitch=0.1inch, Pricing 1="1=0.61000, 10=0.57300, 25=0.51600, 50=0.45840, 100=0.43940, 250=0.40120, 500=0.38208 (USD)", Radiation Hardening=No, RoHS=Yes, Stock 1=1647, Supplier 1=Digi-Key, Termination=Solder, Width=8.51mm
LS1: Manufacturer="CUI Devices", Manufacturer Part Number=CMT-0904-83T, Pricing 1="1=0.82000, 10=0.68400, 25=0.63360, 50=0.59680, 100=0.56130, 500=0.48384, 1000=0.45266, 5000=0.43890 (USD)", RoHS=Yes, Stock 1=521, Supplier 1=Digi-Key
P1: library part "Header 5X2", "Conn Unshrouded Header HDR 10 POS 2.54mm Solder ST Top Entry Thru-Hole BergStik® Bulk", Manufacturer=ICC, Category=Connectors, Manufacturer Part Number=67997-410HLF, Pricing 1="1=0.34200, 10=0.23600, 25=0.23300, 50=0.23000, 100=0.22800, 250=0.21200, 500=0.19800, 1000=0.16800, 2500=0.13600, 5000=0.12800, 10000=0.11300 (USD)", RoHS=No, Stock 1=487, Supplier 1=Newark
Q1: "Transistor BJT NPN", Manufacturer="CUI Devices", Manufacturer Part Number=CMT-0904-83T, Manufacturer_Name=Nexperia, Mouser Part Number=771-PMBT3904-T/R, Arrow Part Number=PMBT3904,215, Arrow Price/Stock=https://www.arrow.com/en/products/pmbt3904215/nexperia, Datasheet Link=http://assets.nexperia.com/documents/data-sheet/PMBT3904.pdf, Height=1.1mm, Manufacturer_Part_Number=PMBT3904,215, Mouser Price/Stock=https://www.mouser.co.uk/ProductDetail/Nexperia/PMBT3904215?qs=LOCUfHb8d9tXximHEgx1nw%3D%3D, Pricing 1="1=0.82000, 10=0.68400, 25=0.63360, 50=0.59680, 100=0.56130, 500=0.48384, 1000=0.45266, 5000=0.43890 (USD)", RoHS=Yes, Stock 1=521, Supplier 1=Digi-Key
R1: library part RMCF0402FT100R, "RES 100 OHM 1% 1/16W 0402", Case Code (Imperial)=0402, Case Code (Metric)=1005, Manufacturer="Stackpole Electronics", Max Operating Temperature=155°C, Max Power Dissipation=63mW, Min Operating Temperature=-55°C, Power Rating=62.5mW, Resistor Type="Thick Film", Temperature Coefficient=100ppm/°C, Tolerance=1%, Case/Package=0402, Category="Chip SMD Resistors", ComponentLink1Description=http://components.arrow.com/part/dataview/50497758S7215546N1174?src-supplier=Arrow+Electronics, ComponentLink1URL=http://components.arrow.com/part/dataview/50497758S7215546N1174?src-supplier=Arrow+Electronics, ComponentLink2Description=https://www.verical.com/server-webapp/html/getDatasheet?partID=368652&src-supplier=Verical, ComponentLink2URL=https://www.verical.com/server-webapp/html/getDatasheet?partID=368652&src-supplier=Verical, ComponentLink3Description=https://www.seielect.com/Catalog/SEI-RMCF_RMCP.pdf?src-supplier=Avnet+Asia, ComponentLink3URL=https://www.seielect.com/Catalog/SEI-RMCF_RMCP.pdf?src-supplier=Avnet+Asia, ComponentLink4Description=https://www.seielect.com/catalog/sei-rmcf_rmcp.pdf?src-supplier=Digi-Key, ComponentLink4URL=https://www.seielect.com/catalog/sei-rmcf_rmcp.pdf?src-supplier=Digi-Key, ComponentLink5Description=https://www.seielect.com/Catalog/SEI-RMCF_RMCP.pdf?src-supplier=Avnet, ComponentLink5URL=https://www.seielect.com/Catalog/SEI-RMCF_RMCP.pdf?src-supplier=Avnet, Construction=Rectangular, Contact Plating=Tin,Matte, Depth=0.5mm, Features="Automotive AEC-Q200", Height=0.016inch, Lead Free="Lead Free", Length=1mm, Manufacturer Part Number=RMCF0402FT100R, Military Standard=Not, Mount="Surface Mount", Number of Terminations=2, Packaging="Tape and Reel", Pricing 1="1=0.10000, 10=0.01500, 100=0.00610, 1000=0.00274, 2500=0.00238, 5000=0.00197 (USD)", Resistance=100R, RoHS=Yes, RoHS Compliant=Yes, Series=RMCF, Stock 1=740125, Supplier 1=Digi-Key, Width=0.02inch
R2: library part RMCF0402FT100R, "RES 1K OHM 1% 1/16W 0402", Case Code (Imperial)=0402, Case Code (Metric)=1005, Manufacturer="Stackpole Electronics", Manufacturer Part Number=RMCF0402FT1K00, Max Operating Temperature=155°C, Max Power Dissipation=63mW, Min Operating Temperature=-55°C, Resistor Type="Thick Film", Temperature Coefficient=100ppm/°C, Tolerance=1%, Case/Package=0402, Category="Chip SMD Resistors", ComponentLink1Description=https://datasheet.ciiva.com/15193/getdatasheetpartid-365385-15193418.pdf?src-supplier=Verical, ComponentLink1URL=https://datasheet.ciiva.com/15193/getdatasheetpartid-365385-15193418.pdf?src-supplier=Verical, ComponentLink2Description=https://datasheet.ciiva.com/24336/sei-rmcp-24336266.pdf?src-supplier=Onlinecomponents.com, ComponentLink2URL=https://datasheet.ciiva.com/24336/sei-rmcp-24336266.pdf?src-supplier=Onlinecomponents.com, Construction=Rectangular, Contact Plating=Tin,Matte, Depth=0.5mm, Features="Automotive AEC-Q200", Height=0.016inch, Lead Free="Lead Free", Length=1mm, Military Standard=Not, Mount="Surface Mount", Number of Terminations=2, Packaging="Tape and Reel", Power Rating=63mW, Pricing 1="1=0.10000, 10=0.01500, 100=0.00610, 1000=0.00274, 2500=0.00238, 5000=0.00197 (USD)", Radiation Hardening=No, Resistance=1kR, RoHS=Yes, RoHS Compliant=Yes, Series=RMCF, Size Code=0402, Stock 1=6621185, Supplier 1=Digi-Key, Width=0.02inch
R3 R4 R5: library part RMCF0402JT10K0, "RES 10K OHM 5% 1/16W 0402", Case Code (Imperial)=0402, Case Code (Metric)=1005, Manufacturer="Stackpole Electronics", Max Operating Temperature=155°C, Max Power Dissipation=63mW, Min Operating Temperature=-55°C, Power Rating=62.5mW, Resistor Type="Thick Film", Temperature Coefficient=100ppm/°C, Tolerance=5%, Working Voltage=50V, Case/Package=0402, Category="Chip SMD Resistors", ComponentLink1Description=https://datasheet.ciiva.com/15193/getdatasheetpartid-360689-15193431.pdf?src-supplier=Verical, ComponentLink1URL=https://datasheet.ciiva.com/15193/getdatasheetpartid-360689-15193431.pdf?src-supplier=Verical, Construction=Rectangular, Contact Plating=Tin,Matte, Depth=0.5mm, Features="Automotive AEC-Q200", Height=0.016inch, Lead Free="Lead Free", Length=1mm, Manufacturer Part Number=RMCF0402JT10K0, Military Standard=Not, Mount="Surface Mount", Number of Terminations=2, Packaging="Tape and Reel", Pricing 1="1=0.10000, 10=0.01200, 100=0.00470, 1000=0.00213, 2500=0.00185, 5000=0.00153 (USD)", Radiation Hardening=No, Resistance=10kR, RoHS=Yes, RoHS Compliant=Yes, Series=RMCF, Stock 1=2720859, Supplier 1=Digi-Key, Technology="THICK FILM", Width=0.02inch
R6 R7: library part RMCF0402JT4K70, "Res Thick Film 0402 4.7K Ohm 5% 1/16W 100ppm/C Molded SMD SMD Paper T/R", Case Code (Imperial)=0402, Case Code (Metric)=1005, Manufacturer="Stackpole Electronics", Max Operating Temperature=155°C, Max Power Dissipation=63mW, Min Operating Temperature=-55°C, Resistor Type="Thick Film", Temperature Coefficient=100ppm/°C, Tolerance=5%, Case/Package=0402, Category="Chip SMD Resistors", ComponentLink1Description=http://components.arrow.com/part/dataview/50582671S6490608N1174?src-supplier=Arrow+Electronics, ComponentLink1URL=http://components.arrow.com/part/dataview/50582671S6490608N1174?src-supplier=Arrow+Electronics, ComponentLink2Description=https://www.seielect.com/catalog/sei-rmcf_rmcp.pdf?src-supplier=Digi-Key, ComponentLink2URL=https://www.seielect.com/catalog/sei-rmcf_rmcp.pdf?src-supplier=Digi-Key, ComponentLink3Description=https://www.seielect.com/catalog/SEI-RMCF_RMCP.pdf?src-supplier=Avnet, ComponentLink3URL=https://www.seielect.com/catalog/SEI-RMCF_RMCP.pdf?src-supplier=Avnet, Construction=Rectangular, Contact Plating=Tin,Matte, Depth=0.5mm, Features="Automotive AEC-Q200", Height=0.016inch, Lead Free="Lead Free", Length=0.039inch, Manufacturer Part Number=RMCF0402JT4K70, Military Standard=Not, Mount="Surface Mount", Number of Terminations=2, Packaging="Tape and Reel", Power Rating=63mW, Pricing 1="1=0.10000, 10=0.01200, 100=0.00470, 1000=0.00213, 2500=0.00185, 5000=0.00153 (USD)", Radiation Hardening=No, Resistance=4.7kR, RoHS=Yes, RoHS Compliant=Yes, Series=RMCF, Stock 1=1370895, Supplier 1=Digi-Key, Width=0.02inch
R8: library part RMCF0402JT10K0, "RES 10K OHM 5% 1/16W 0402", Case Code (Imperial)=0402, Case Code (Metric)=1005, Manufacturer="Stackpole Electronics", Max Operating Temperature=155°C, Max Power Dissipation=63mW, Min Operating Temperature=-55°C, Power Rating=62.5mW, Resistance=10kR, Resistor Type="Thick Film", Temperature Coefficient=100ppm/°C, Tolerance=5%, Working Voltage=50V, Case/Package=0402, Category="Chip SMD Resistors", ComponentLink1Description=https://datasheet.ciiva.com/15193/getdatasheetpartid-360689-15193431.pdf?src-supplier=Verical, ComponentLink1URL=https://datasheet.ciiva.com/15193/getdatasheetpartid-360689-15193431.pdf?src-supplier=Verical, Construction=Rectangular, Contact Plating=Tin,Matte, Depth=0.5mm, Features="Automotive AEC-Q200", Height=0.016inch, Lead Free="Lead Free", Length=1mm, Manufacturer Part Number=RMCF0402JT10K0, Military Standard=Not, Mount="Surface Mount", Number of Terminations=2, Packaging="Tape and Reel", Pricing 1="1=0.10000, 10=0.01200, 100=0.00470, 1000=0.00213, 2500=0.00185, 5000=0.00153 (USD)", Radiation Hardening=No, RoHS=Yes, RoHS Compliant=Yes, Series=RMCF, Stock 1=2720859, Supplier 1=Digi-Key, Technology="THICK FILM", Width=0.02inch
R9 R10: library part RMCF0402JT10K0_1, "SMD Chip Resistor, 0402 [1005 Metric], 180 ohm, CRGCQ Series, 50 V, Thick Film, 63 mW", Case/Package=0402, Manufacturer="TE Connectivity", Manufacturer Part Number=CRGCQ0402F180R, Max Operating Temperature=155°C, Max Power Dissipation=63mW, Min Operating Temperature=-55°C, Resistor Type="Thick Film", Temperature Coefficient=100ppm/°C, Tolerance=1%, Category="Chip SMD Resistors", ComponentLink1Description=http://www.farnell.com/datasheets/2609223.pdf?src-supplier=Farnell, ComponentLink1URL=http://www.farnell.com/datasheets/2609223.pdf?src-supplier=Farnell, ComponentLink2Description=http://www.te.com/commerce/DocumentDelivery/DDEController?Action=srchrtrv&DocNm=1773204-3&DocType=DS&DocLang=English&src-supplier=Digi-Key, ComponentLink2URL=http://www.te.com/commerce/DocumentDelivery/DDEController?Action=srchrtrv&DocNm=1773204-3&DocType=DS&DocLang=English&src-supplier=Digi-Key, Features="Moisture Resistant,Automotive AEC-Q200", Number of Terminations=2, Packaging="Cut Tape", Pricing 1="1=0.10000, 10=0.02500, 100=0.01020, 1000=0.00457, 2500=0.00397, 5000=0.00328 (USD)", Resistance=180R, RoHS=Yes, RoHS Compliant=Yes, Stock 1=308550, Supplier 1=Digi-Key
S1: "E-SWITCH - TL3315NF100Q - SWITCH, TACTILE, SPST, 50mA, 15VDC", Case/Package=SMD/SMT, Color=Yellow, Contact Resistance=200mR, Current Rating=50mA, Manufacturer=E-Switch, Max Operating Temperature=70°C, Max Voltage Rating (DC)=15V, Min Operating Temperature=-20°C, Operating Force=100gf, Package Quantity=1, Actuator Length=0mm, Category="Tactile Switches", ComponentLink1Description=https://datasheet.ciiva.com/2900/p010336b-2900756.pdf?src-supplier=Digi-Key, ComponentLink1URL=https://datasheet.ciiva.com/2900/p010336b-2900756.pdf?src-supplier=Digi-Key, ComponentLink2Description=https://datasheet.ciiva.com/5284/tl3315-7499-5284548.pdf?src-supplier=Mouser, ComponentLink2URL=https://datasheet.ciiva.com/5284/tl3315-7499-5284548.pdf?src-supplier=Mouser, ComponentLink3Description=https://datasheet.ciiva.com/2900/tl3315-2900758.pdf?src-supplier=Digi-Key, ComponentLink3URL=https://datasheet.ciiva.com/2900/tl3315-2900758.pdf?src-supplier=Digi-Key, ComponentLink4Description=https://datasheet.ciiva.com/2900/tl3315-2900757.pdf?src-supplier=Digi-Key, ComponentLink4URL=https://datasheet.ciiva.com/2900/tl3315-2900757.pdf?src-supplier=Digi-Key, ComponentLink5Description=https://datasheet.ciiva.com/16156/tl3315-16156332.pdf?src-supplier=Onlinecomponents.com, ComponentLink5URL=https://datasheet.ciiva.com/16156/tl3315-16156332.pdf?src-supplier=Onlinecomponents.com, Contact Material=Silver, Contact Plating=Silver, Electrical Life=1000000Cycles, Illumination Type=Non-Illuminated, Lead Free="Lead Free", Manufacturer Part Number=TL3315NF100Q, Mechanical Life=1000000Cycles, Mount="Surface Mount", Orientation=Straight, Packaging="Tape and Reel", Pricing 1="1=0.15000, 10=0.14400, 25=0.13600, 100=0.12370, 250=0.11632, 500=0.10640, 1000=0.08908, 2500=0.08661 (USD)", RoHS=Yes, RoHS Compliant=Yes, Series=TL3315, Size=5mm, Stock 1=908028, Supplier 1=Digi-Key, Switch Function=Off-Mom, Switch Travel=0.2mm, Termination="Gull Wing", Throw Configuration=SPST, Voltage Rating (DC)=15V
S2: library part 1101M2S3AQE2, "Switch", Manufacturer_Name="C & K COMPONENTS", Mouser Part Number=611-1101M2S3AQE2, Arrow Part Number=1101M2S3AQE2, Arrow Price/Stock=https://www.arrow.com/en/products/1101m2s3aqe2/ck?region=nac, Datasheet Link=https://www.mouser.com/datasheet/2/60/1000-1291023.pdf, Height=6.6mm, Manufacturer_Part_Number=1101M2S3AQE2, Mouser Price/Stock=https://www.mouser.co.uk/ProductDetail/CK/1101M2S3AQE2?qs=XK7TQRbusgUqE8cJ4UzU5w%3D%3D
U1: library part MIC5528-3.3YMT-TR, "LDO Regulator Pos 3.3V 0.5A 6-Pin TDFN EP T/R", Dropout Voltage=260mV, Manufacturer=Microchip, Max Operating Temperature=125°C, Min Current Limit=525mA, Min Operating Temperature=-40°C, Output Current=500mA, Output Voltage=3.3V, Supplier Part Number 1=576-4766-1-ND, Category="Voltage Regulators - Linear", ComponentLink1Description=http://www.microchip.com/mymicrochip/filehandler.aspx?ddocname=en580311&src-supplier=Digi-Key, ComponentLink1URL=http://www.microchip.com/mymicrochip/filehandler.aspx?ddocname=en580311&src-supplier=Digi-Key, Manufacturer Part Number=MIC5528-3.3YMT-TR, Mount="Surface Mount", Number of Regulators=1, Packaging="Tape and Reel", Pricing 1="1=0.23000, 25=0.20160, 100=0.18020 (USD)", RoHS=No, Stock 1=7816, Supplier 1=Digi-Key
Y1: library part XRCGB24M000F0L00R0, "MURATA - XRCGB24M000F0L00R0 - QUARZRESONATOR, 24MHZ, 150PPM", Case/Package=SMD/SMT, ESR (Equivalent Series Resistance)=150R, Frequency Stability=50ppm, Frequency Tolerance=100ppm, Load Capacitance=6pF, Manufacturer=Murata, Max Operating Temperature=85°C, Min Operating Temperature=-30°C, Operating Frequency="24 MHz", Package Quantity=3000, Category=Crystals, ComponentLink1Description=https://datasheet.ciiva.com/3852/part15-3852009.pdf?src-supplier=Arrow+Electronics, ComponentLink1URL=https://datasheet.ciiva.com/3852/part15-3852009.pdf?src-supplier=Arrow+Electronics, ComponentLink2Description=https://datasheet.ciiva.com/852/p79e-852274.pdf?src-supplier=Digi-Key, ComponentLink2URL=https://datasheet.ciiva.com/852/p79e-852274.pdf?src-supplier=Digi-Key, ComponentLink3Description=https://datasheet.ciiva.com/852/p79e-852275.pdf?src-supplier=Digi-Key, ComponentLink3URL=https://datasheet.ciiva.com/852/p79e-852275.pdf?src-supplier=Digi-Key, ComponentLink4Description=https://datasheet.ciiva.com/852/p79e-852276.pdf?src-supplier=Digi-Key, ComponentLink4URL=https://datasheet.ciiva.com/852/p79e-852276.pdf?src-supplier=Digi-Key, ComponentLink5Description=https://datasheet.ciiva.com/1361/l0445e-1361516.pdf?src-supplier=Element14, ComponentLink5URL=https://datasheet.ciiva.com/1361/l0445e-1361516.pdf?src-supplier=Element14, ComponentLink6Description=https://datasheet.ciiva.com/22695/1911263-22695436.pdf?src-supplier=Element14, ComponentLink6URL=https://datasheet.ciiva.com/22695/1911263-22695436.pdf?src-supplier=Element14, Depth=1.6mm, Frequency=24MHz, Height=0.028inch, Lead Free="Lead Free", Length=2mm, Manufacturer Part Number=XRCGB24M000F0L00R0, Mount="Surface Mount", Number of Pins=4, Packaging="Tape and Reel", Pricing 1="1=0.32000, 10=0.26800, 50=0.24160, 100=0.21480, 500=0.20406, 1000=0.17184 (USD)", REACH SVHC="No SVHC", RoHS=Yes, RoHS Compliant=Yes, Series=XRCGB, Series Resistance=150R, Stock 1=108646, Supplier 1=Digi-Key, Termination=SMD/SMT, Tolerance=100ppm, Width=1.6mm

## Free pads (board coordinates)
  round 3.5 hole 2.7 unplated mask+0.102: 1(30.512,79.576) 1(55.072,6.567)

## Via types
v1: diameter 0.8, hole 0.4, Top Layer to Bottom Layer, tented both sides, 15 vias
v2: diameter 0.6, hole 0.3, Top Layer to Bottom Layer, tented both sides, 3 vias
v3: diameter 1, hole 0.5, Top Layer to Bottom Layer, tented both sides, 2 vias
v4: diameter 1.27, hole 0.711, Top Layer to Bottom Layer, tented both sides, 1 vias

## Nets (pads, with @x,y where several pads share a name; then routed paths per layer and width w, separated by ;. In a path a pad name is that pad's centre, name@x,y a point inside that pad or via, vN(x,y) a via of type N, cw(c..) or ccw(c..) an arc to the next point about the centre after c; other vN are vias at no path point)
+5: J1.A9 J1.B9 J2.4 R9.1 | length 66
  Top Layer w0.254: v3(72.251,65.938) 71.159,67.031 66.446,67.031 65.278,65.862 65.278,63.383 63.576,61.681 63.576,23.774 72.289,15.061 R9.1
GND: BATT.2 C1.1 C2.1 C3.1 C4.1 C5.2 C6.2 C7.1 C8.1 D1.5 FB2.1 IC1.12 IC1.33 J1.A12 J1.B12 J1.S1 J1.S2 J1.S3 J1.S4 J2.2 LCD1.01 LS1.N P1.3 P1.5 P1.9 pad.1@30.512,79.576 R8.2 S1.1 S1.2 S2.3 S2.4 S2.5 U1.3 U1.7 | length 24.1
  Top Layer w0.15: v1(34.011,57.582) 34.044,57.615 35.812,57.615 FB2.1 ; v1(41.851,62.027) C1.1 ; C2.1 43.85,63.774 43.866,63.79 43.851,63.805 43.851,64.806 v1(43.866,64.821) ; 44.079,50.371 44.587,50.371 45,50.784 C4.1 ; R8.2 66.706,64.739 67.412,64.033 72.225,64.033 C8.1 73.203,64.059 74.193,65.049 v1(74.193,66.169) ; C7.1 67.16,58.776 v1(68.224,58.776) ; U1.3 68.453,59.524 68.242,59.313 68.242,58.793 v1(68.224,58.776) ; J2.2 U1.7 69.528,59.907 69.528,59.139 69.102,58.714 68.286,58.714 v1(68.224,58.776) ; v2(75.438,11.435) 75.438,11.398 76.876,9.959 D1.5@76.876,9.922
  other v1: 41.725,56.436 42.685,56.436 43.697,56.446 43.697,57.412 41.697,57.436 42.667,57.424 43.697,58.412 41.672,58.436 42.669,58.436
  other v4: 24.994,58.494
Latch0: IC1.24 Latch0.2 | length 15.2
  Top Layer w0.15: IC1.24 49.196,58.848 49.987,59.639 54.458,59.639 56.369,61.551 Latch0.2
Latch1: IC1.15 Latch1.2 | length 49
  Top Layer w0.15: IC1.15 IC1.15 43.671,54.932 44.018,54.585 53.365,54.585 54.066,53.884 54.066,21.931 56.522,19.475 Latch1.2
Latch2: IC1.23 Latch2.2 | length 12.6
  Top Layer w0.15: IC1.23 49.228,58.448 50.038,59.258 Latch2.2@56.141,59.258 ; 55.684,59.258 56.04,58.903 Latch2.2
Latch3: IC1.9 Latch3.2 | length 25.3
  Top Layer w0.15: Latch3.2 34.239,35.509 36.754,38.024 36.754,52.781 39.421,55.448 IC1.9
Latch4: IC1.22 Latch4.2 | length 16
  Top Layer w0.15: IC1.22 49.273,58.048 50.152,58.927 54.509,58.927 56.369,57.067 Latch4.2
Latch5: IC1.17 Latch5.2 | length 38.7
  Top Layer w0.15: IC1.17 53.985,56.048 54.666,55.367 54.666,31.669 56.522,29.813 Latch5.2
Latch6: IC1.1 Latch6.2 | length 20.7
  Top Layer w0.15: Latch6.2 23.253,61.697 33.782,61.697 34.965,60.514 40.274,60.514 40.669,60.118 IC1.1
Latch7: IC1.18 Latch7.2 | length 34.4
  Top Layer w0.15: IC1.18 44.679,56.458 54.006,56.458 54.966,55.499 54.966,35.484 56.512,33.937 Latch7.2 ; Latch7.2@56.66,33.303 56.814,33.149 Latch7.2@56.859,33.149
Latch8: IC1.31 Latch8.2 | length 17
  Top Layer w0.15: Latch8.2 28.359,63.627 32.868,63.627 35.281,61.214 40.806,61.214 41.669,60.351 IC1.31
Latch9: IC1.32 Latch9.2 | length 10.5
  Top Layer w0.15: Latch9.2 33.318,62.643 35.103,60.858 40.564,60.858 41.269,60.153 IC1.32
Latchadd: IC1.14 Latchadd.2 | length 54.5
  Top Layer w0.15: IC1.14 43.269,54.826 43.815,54.28 53.238,54.28 53.696,53.823 53.696,17.415 56.512,14.598 Latchadd.2
Latchdiv: IC1.25 Latchdiv.2 | length 20.7
  Top Layer w0.15: IC1.25 44.069,59.236 44.094,59.211 44.306,59.211 44.31,59.207 49.098,59.207 49.86,59.969 54.254,59.969 55.194,60.909 55.194,66.472 56.369,67.647 Latchdiv.2
Latchmul: IC1.16 Latchmul.2 | length 43.5